# Allegro board 95569-501-A2.brd
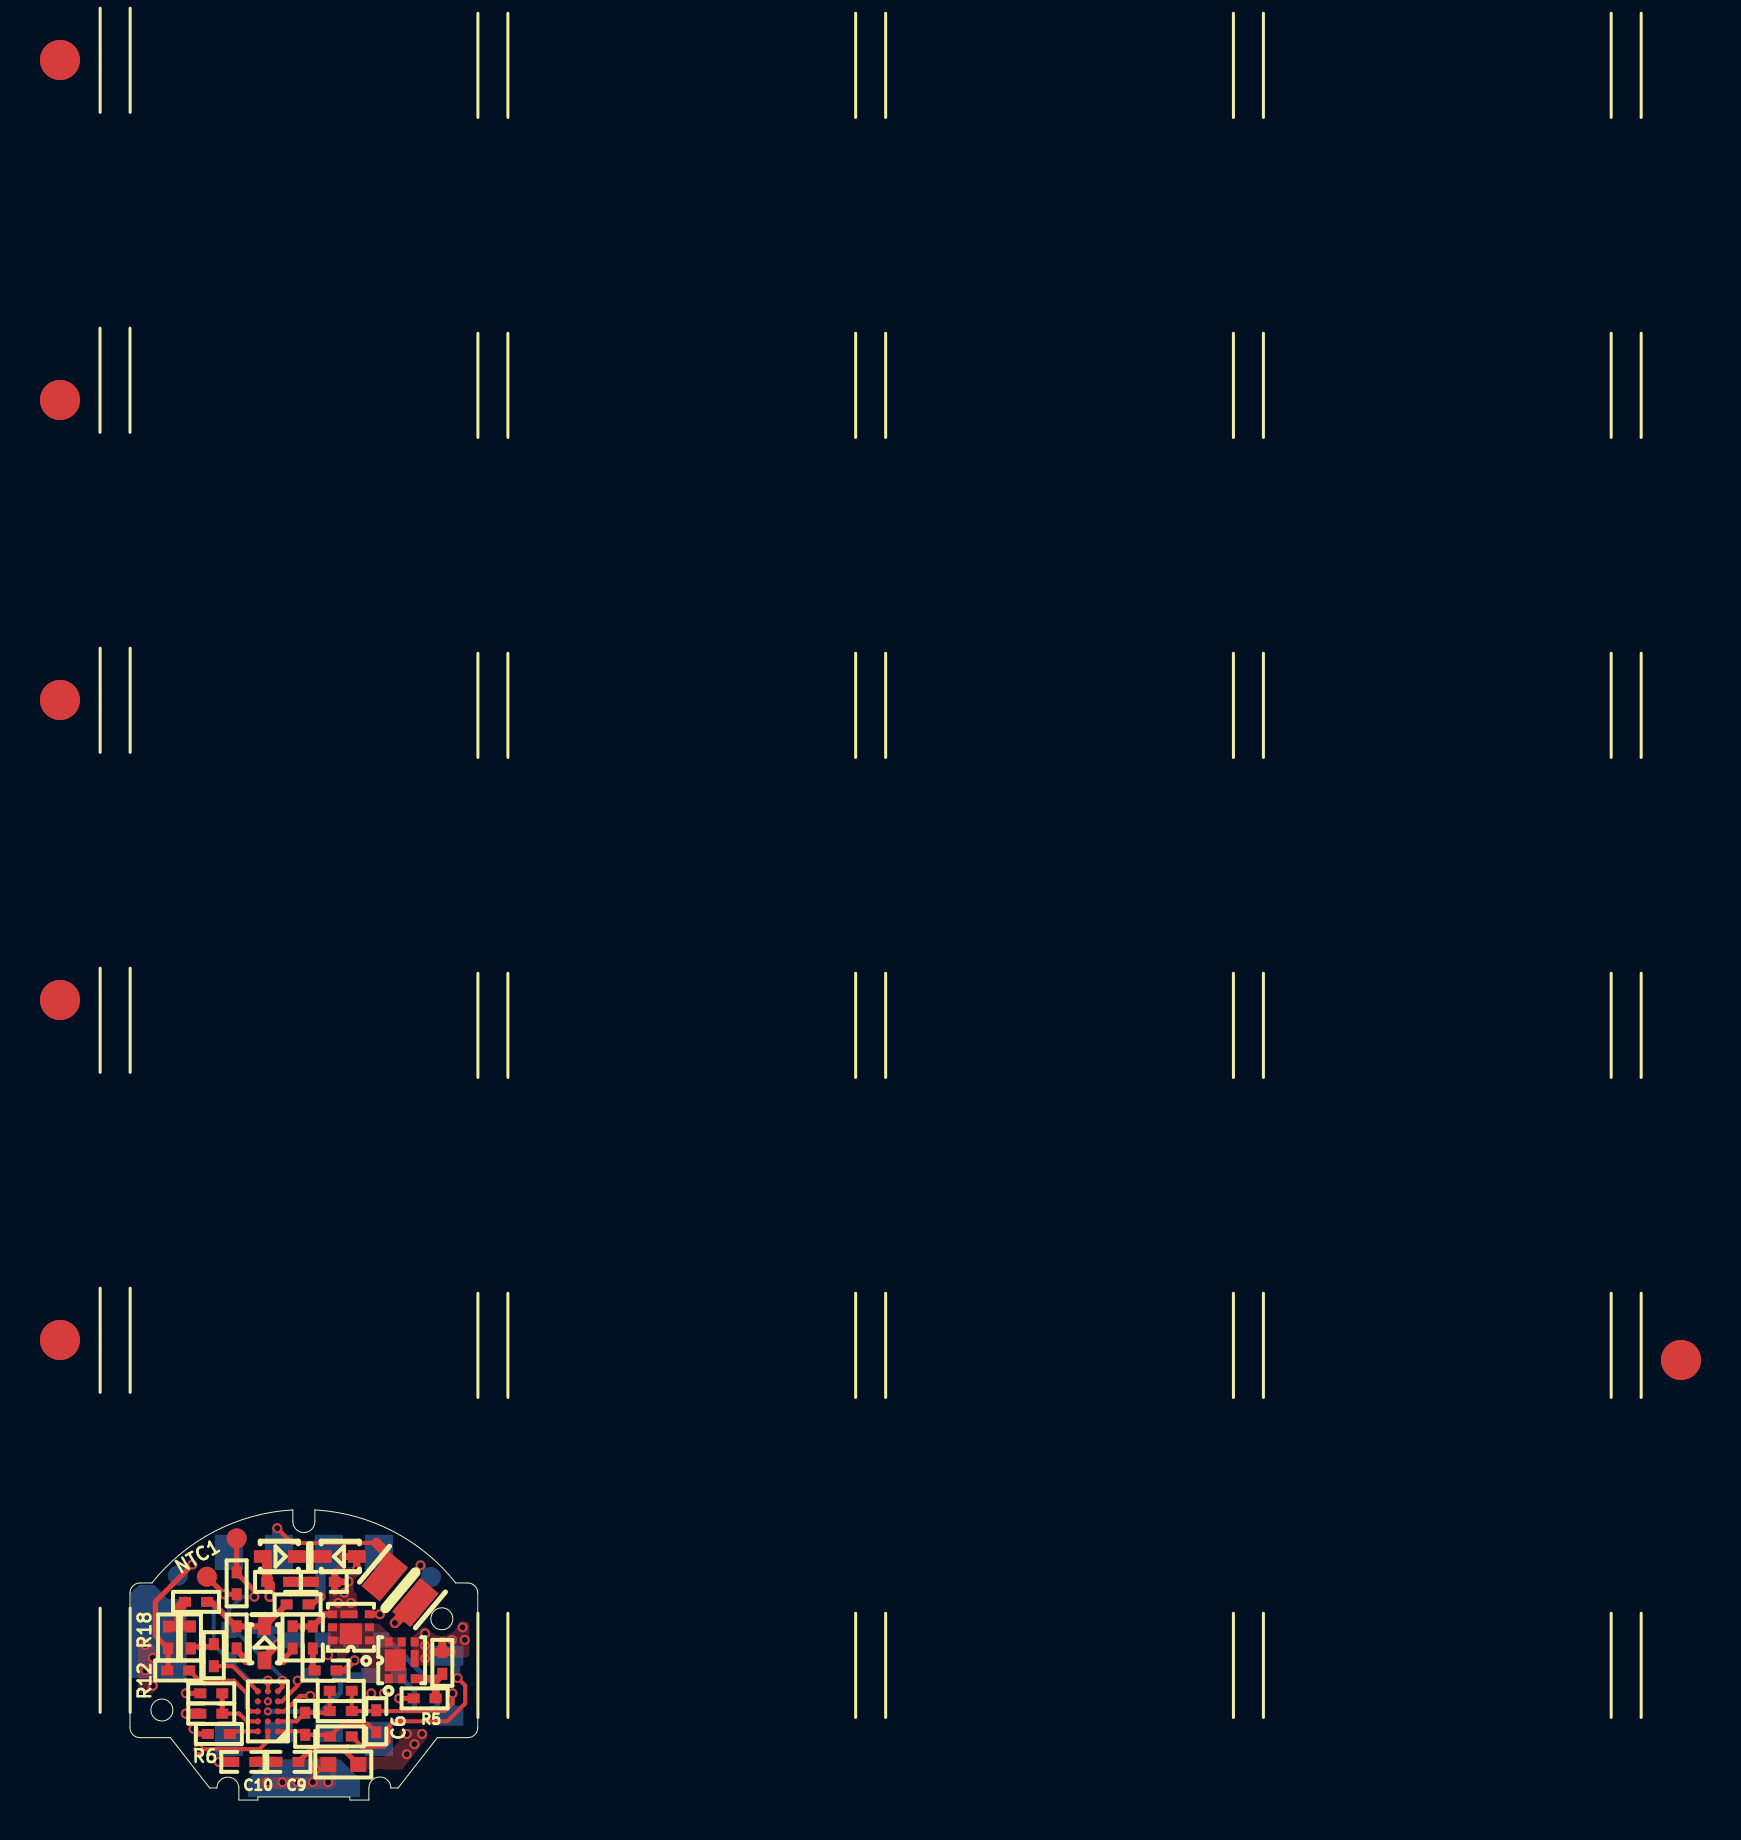
[diagram p0: board, top side]
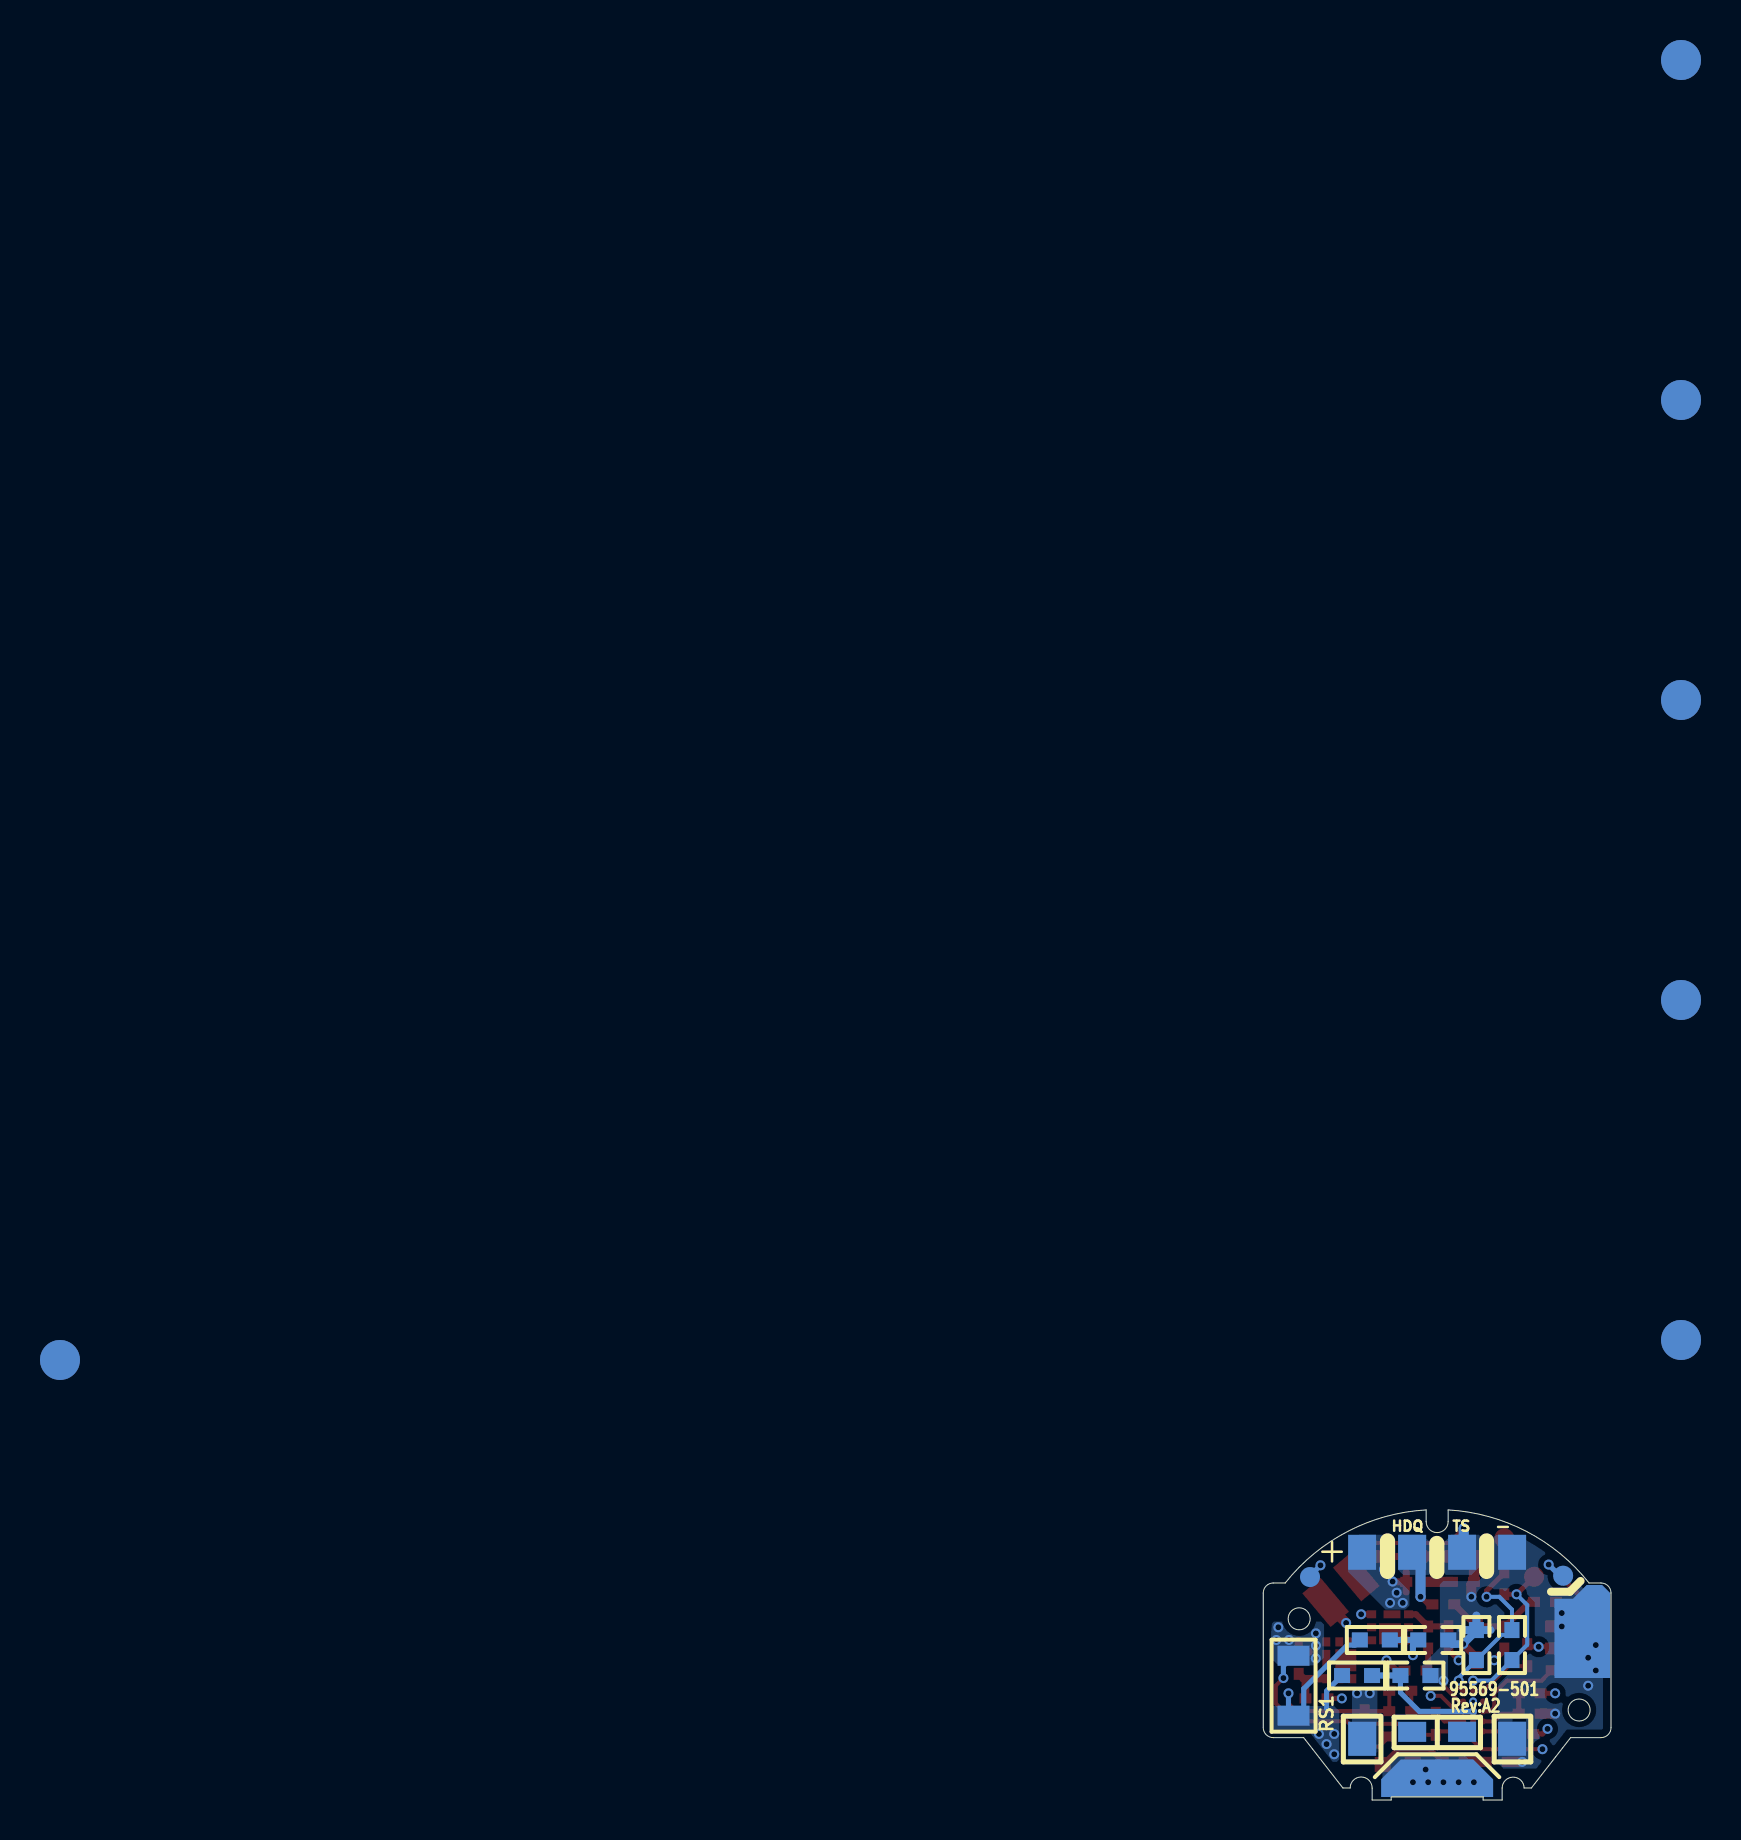
[diagram p1: board, bottom side, seen from below]

Outline 17.39 x 14.5 mm; copper layers: TOP, L2GND, L3, BOTTOM. Coordinates in mm from the lower left corner of the outline.
Outline path: circle c1.6,4.5 r0.55 ; circle c15.6,9.06 r0.55 ; 0,10.35 arc(0.15,10.7) 0.5,10.85 1.1,10.85 arc(4.23,13.43) 8.15,14.5 8.15,13.92 arc(8.7,13.37) 9.25,13.92 9.25,14.5 arc(13.16,13.43) 16.29,10.85 16.89,10.85 arc(17.24,10.7) 17.39,10.35 17.39,3.62 arc(17.24,3.27) 16.89,3.12 15.37,3.12 13.41,0.6 13.05,0.6 arc(12.5,1.15) 11.95,0.6 11.95,0 11,0 11,0.15 6.4,0.15 6.4,0 5.45,0 5.45,0.6 arc(4.9,1.15) 4.35,0.6 3.98,0.6 2.02,3.12 0.5,3.12 arc(0.15,3.27) 0,3.62 0,10.35

## Placement (name value [footprint] x y rotation side)
C1  0.1uF/25V  [0603C]  8.89 8 180 bottom
C2  0.1uF/25V  [0603C]  9.78 6.22 180 bottom
C3  0.47uF/10V  [0603C]  4.95 7.75 90 bottom
C4  4.7uF/10V  [0603C]  6.73 7.75 90 bottom
C5  0.1uF/16V  [0402C]  10.54 5.46 0 top
C6  0.1uF/16V  [0402C]  12.32 3.94 270 top
C7  0.1uF/16V  [0402C]  8.76 3.81 270 top
C8  0.1uF/16V  [0402C]  4.06 4.32 180 top
C9  0.1uF/16V  [0402C]  7.87 1.91 180 top
C10  0.1uF/16V  [0402C]  5.71 1.91 180 top
C11  0.1uF/16V  [0402C]  9.78 6.48 180 top
C12  0.1uF/16V  [0402C]  9.14 8.13 90 top
C13  0.1uF/16V  [0402C]  9.69 10.91 180 top
C14  0.1uF/16V  [0402C]  7.4 10.91 180 top
CELL+  Test Point  [TP15]  8.64 1.27 180 bottom
CELL-  Test Point  [TP15]  1.56 8.49 270 bottom
F1  5A 32V  [0603R]  10.67 1.78 0 top
J1  5795 output connector  [JACK-5795]  8.35 11.21 180 bottom
NOREF  -  []  -7.5 0 90 top
NOREF#2  -  []  1.6 4.5 0 top
NOREF#3  -  [unnamed#2]  -3.5 70 0 top
NOREF#4  -  []  -5.71 120.62 0 top
NOREF#5  -  [unnamed#2]  -3.5 23 0 top
NOREF#6  -  [unnamed#2]  -3.5 87 0 top
NOREF#7  -  []  18.89 3.62 0 top
NOREF#8  -  []  0 3.62 0 top
NOREF#9  -  []  -7.5 0 0 top
NOREF#10  -  []  17.35 11.61 0 top
NOREF#11  -  []  75.56 0 0 top
NOREF#12  -  []  6.4 16 90 top
NOREF#13  -  []  5.45 0 90 top
NOREF#14  -  [unnamed#2]  -3.5 55 0 top
NOREF#15  -  [unnamed#2]  -3.5 40 0 top
NOREF#16  -  []  -7.5 0 0 top
NOREF#17  -  []  54.99 -7.62 0 top
NOREF#18  -  [unnamed#2]  77.56 22 0 top
NOREF#19  -  [unnamed#2]  -3.5 87 180 bottom
NOREF#20  -  [unnamed#2]  -3.5 40 180 bottom
NOREF#21  -  [unnamed#2]  -3.5 70 180 bottom
NOREF#22  -  [unnamed#2]  -3.5 55 180 bottom
NOREF#23  -  [unnamed#3]  9.95 3.41 180 bottom
NOREF#24  -  [unnamed#3]  7.45 3.41 180 bottom
NOREF#25  -  [unnamed#2]  -3.5 23 180 bottom
NOREF#26  -  [unnamed#2]  77.56 22 180 bottom
NTC1  0402 10K B=3435K  [0402R]  5.33 10.83 270 top
NTC2  NXFT15XH103FA2B025  [NTC2-5795]  12.74 11.16 320 top
PACK+  Test Point  [PAD1D4X1D7]  12.45 3.06 180 bottom
PACK-  Test Point  [PAD1D4X1D7]  4.95 3.06 180 bottom
Q1  CSD13202q2/AP6982GN2  [SON6]  11.05 8.64 90 top
Q2  CSD13202q2/AP6982GN2  [SON6]  13.59 6.99 0 top
R3  200R  [0402R]  10.54 4.45 0 top
R4  200R  [0402R]  10.54 3.18 0 top
R5  1k  [0402R]  14.73 5.08 0 top
R6  1k  [0402R]  4.45 3.3 180 top
R7  10M  [0402R]  15.62 6.86 90 top
R8  10M  [0402R]  8.13 8.13 90 top
R9  2k  [0402R]  4.06 5.33 180 top
R10  100R  [0402R]  5.33 8.13 270 top
R11  100R  [0402R]  8.38 9.78 180 top
R12  100R  [0402R]  2.41 6.48 0 top
R14  100R  [0402R]  4.19 7.24 270 top
R16  1M  [0402R]  3.3 9.91 180 top
R17  1M  [0402R]  3.05 8.13 90 top
R18  1M  [0402R]  1.91 8.13 90 top
RF1  10R  [0603R]  11.81 8 0 bottom
RF2  10R  [0603R]  12.7 6.22 0 bottom
RS1  10mR  [1206R]  15.88 5.72 90 bottom
TP1  Test Point  [TP10]  2.39 11.21 190 bottom
TP2  Test Point  [TP10]  15.05 11.15 170 bottom
TP15  Test Point  [TP10]  3.85 11.16 0 top
TP16  Test Point  [TP10]  5.33 13.08 0 top
U1  SN27742  [BGA-15-50]  6.9 4.43 180 top
ZD1  5V  [SOD-523-AK]  6.73 7.87 90 top
ZD4  ESD5Z12T1G  [SOD-523-AK]  10.45 12.18 180 top
ZD5  ESD5Z12T1G  [SOD-523-AK]  7.53 12.18 0 top

## Library data of the parts
C1-C14 = 0603C
CELL+ CELL- PACK+ PACK- TP1 TP2 TP15 TP16 = Test Point
F1 = FUSE2
J1 = 5795 output connector
NTC1 NTC2 = NTC
Q1 Q2 = MOS-8PIN-SGD_1
R3-R12 R14 R16-R18 RF1 RF2 = 0603R
RS1 = R
U1 = bq27742-G1
ZD1 ZD4 ZD5 = ZENER_1

## Footprints (pads in the part's own frame, mm; a bottom-side part is the same pattern mirrored in y, then rotated)
0402C
  rect 0.6x0.5 smd: 1(-0.55,0) 2(0.55,0)
0402R
  rect 0.6x0.5 smd: 1(-0.55,0) 2(0.55,0)
0603C
  rect 0.8x0.75 smd: 1(-0.75,0) 2(0.75,0)
0603R
  rect 0.8x0.75 smd: 1(-0.75,0) 2(0.75,0)
1206R
  rect 1x1.6 smd: 1(-1.5,0) 2(1.5,0)
BGA-15-50
  round 0.305 smd: A1(-0.5,1) A2(0,1) A3(0.5,1) B1(-0.5,0.5) B2(0,0.5) B3(0.5,0.5) C1(-0.5,0) C2(0,0) C3(0.5,0) D1(-0.5,-0.5) D2(0,-0.5) D3(0.5,-0.5) E1(-0.5,-1) E2(0,-1) E3(0.5,-1)
JACK-5795
  rect 1.4x1.75 smd: 1(-4.091,1.178) 2(-1.591,1.178) 3(0.909,1.178) 4(3.409,1.178)
NTC2-5795
  rect 1.2x2.2 smd: 1(0,0) 2(2,0)
PAD1D4X1D7
  rect 1.4x1.7 smd: 1(0,0)
SOD-523-AK
  rect 0.889x0.635 smd: A(-0.889,0) K(0.813,0)
SON6
  rect 0.4x0.455 smd: D1(-0.65,-0.922) D2(0,-0.922) D3(0,0.922) D4(-0.65,0.922) G(0.65,-0.922) S1(0.65,0.922)
  rect 1.05x1.1 smd: D5(-0.325,0)
  rect 0.4x0.85 smd: S2(0.65,0.096)
TP10
  round 1 smd: 1(0,0)
TP15
  round 1.5 smd: 1(0,0)
unnamed#2
  round 2 smd: 1(0,0)
unnamed#3
  rect 1.4x1 smd: 1(0,0)

## Nets
GND: C1.2 C2.2 C4.2 C8.2 C10.2 C14.2 CELL-.1(TP) J1.4(PACK-) NTC2.2 PACK-.1(TP) R16.2 R17.2 R18.2 U1.D1(VSS) ZD1.A ZD5.A
N00340: Q1.D1 Q1.D2 Q1.D3 Q1.D4 Q1.D5 Q2.D1 Q2.D2 Q2.D3 Q2.D4 Q2.D5
N00474: C11.1 Q2.S1 Q2.S2 R4.2 R7.2 RS1.2
N00529: C12.2 C13.1 J1.1(PACK+) PACK+.1(TP) Q1.S1 Q1.S2 R8.2 R9.2 ZD4.A
N00793: C5.2 C6.1 C9.1 F1.2 R3.2 RF1.2 RF2.2 RS1.1
N00855: C1.1 RF1.1 U1.C1(VPWR)
N00862: C2.1 RF2.1 U1.C2(BAT)
N01269: C3.2 C4.1 NTC1.1 TP16.1(TP) U1.E1(REG25)
N01379: C3.1 NTC1.2 TP15.1(TP) U1.E2(TS)
N01597: C5.1 C7.1 R3.1 U1.B1(SRN)
N01602: C6.2 C7.2 R4.1 U1.A1(SRP)
N02161: Q2.G R5.2 R7.1
N02165: R5.1 U1.A2(CHG)
N02204: Q1.G R6.2 R8.1
N02208: R6.1 U1.A3(DSG)
N02619: C8.1 R9.1 U1.B3(PACKP)
N02905: C9.2 C10.1
N03470: C11.2 C12.1
N04907: R10.2 U1.D2(HDQ)
N04919: R10.1 R11.2 R16.1 ZD1.K
N05203: R12.1 R18.1 TP1.1(TP)
N05207: R14.1 R17.1 TP2.1(TP)
N9623273: R12.2 U1.C3(SDA)
N9623277: R14.2 U1.E3(SCL)
N9626839: CELL+.1(TP) F1.1
N9637865: C13.2 C14.1
N9637929: ZD4.K ZD5.K
N9639478: J1.3(TS) NTC2.1
N9646129: J1.2(HDQ) R11.1

Pads without a net: NOREF#3 1; NOREF#5 1; NOREF#6 1; NOREF#14 1; NOREF#15 1; NOREF#18 1; NOREF#19 1; NOREF#20 1; NOREF#21 1; NOREF#22 1; NOREF#23 1; NOREF#24 1; NOREF#25 1; NOREF#26 1; U1 B2 D3

## Via types
v1: diameter 0.5, hole 0.3, TOP to BOTTOM, 56 vias
v2: diameter 0.4, hole 0.2, TOP to BOTTOM, 2 vias

## Routing (per net, layer and track width the routed paths; a pad name or vN(x,y) marks a point on that pad's centre or on a via; arc(x,y) is an arc through that point)
GND: length 14.1
  TOP w0.2: v1(8.38,5.97) 8.38,5.72 7.6,4.93 U1.D1
  TOP w0.381: ZD1.A 6.73,7.14 v1(7.39,7.8)
  TOP w0.508: v1(2.46,8.68) R18.2 ; v1(2.46,8.68) R17.2 ; v1(2.46,8.68) v1(2.46,9.35) 2.46,9.63 2.74,9.91 R16.2 ; ZD5.A 6.85,11.96 C14.2 6.99,10.78 v1(6.99,10.16) ; C8.2 v1(2.79,4.32) ; v1(13.25,8.85) NTC2.2 ; C10.2 v1(4.45,1.91)
  BOTTOM w0.381: C1.2 7.94,7.8 v1(7.39,7.8) 6.73,8.46 C4.2
  BOTTOM w0.4: 6.03,8.5 C4.2 ; C4.2 7.43,8.5 ; C4.2 6.73,9.22
  vias: v1(0.76,7.75) v1(0.76,6.48) v1(1.14,7.11) v1(1.14,5.72)
N00474: length 16.2
  TOP w0.2: R4.2 11.6,2.67 12.7,2.67 12.95,2.92 12.95,3.68 13.21,3.94 15.88,3.94 16.76,4.83 16.76,5.72 v1(16.38,6.1)
  TOP w0.305: C11.1 10.72,6.48 v1(11.23,6.99)
  TOP w0.4: R7.2 16.12,7.41 ; R7.2 15.12,7.41 ; R7.2 15.62,7.96
  L3 w0.305: v1(11.23,6.99) 14.67,6.99 v1(14.76,7.08)
  BOTTOM w0.254: v1(16.38,6.1) 16.38,6.71 RS1.2
  vias: v1(14.76,8.33) v1(14.76,7.72) v1(16.1,8) v1(16.64,8.64) v1(16.74,8)
N00529: length 24
  TOP w0.254: R9.2 v1(2.79,5.33)
  TOP w0.305: Q1.S1 9.75,9.29 C12.2 R8.2
  TOP w0.356: C13.1 10.24,11.41 ; C13.1 10.79,10.91 ; C13.1 10.24,10.41 ; 10.65,12.18 ZD4.A 11.34,11.61
  L2GND w0.508: v1(12.7,5.33) v1(12.06,5.33) ; v1(10.92,10.92) 10.92,10.57 v1(10.72,10.36) 10.72,10.16 v1(10.41,9.86) v1(11.05,9.86) 11.05,10.8 v1(10.92,10.92)
  L2GND w0.762: 12.45,5.33 12.45,7.62 11.05,9.02 v1(11.05,9.86)
  L3 w0.305: v1(10.41,9.86) 10.08,9.53 6.99,9.53 v1(2.79,5.33)
  vias: v1(11.35,11.53)
N00793: length 18.6
  TOP w0.2: v1(16.13,5.33) 16.13,4.83 15.75,4.45 12.36,4.45 C6.1 12.28,4.45 R3.2 C5.2
  TOP w0.254: C9.1 9.06,2.54 10.66,2.54 F1.2
  BOTTOM w0.254: RS1.1 16.13,4.47 v1(16.13,5.33) ; 15.37,4.32 15.37,5.56 13.18,7.75 12.82,7.75 RF1.2 ; RF2.2 14.22,5.45 14.22,4.57
  vias: v1(13.84,3.3) v1(13.84,2.29) v1(14.22,2.79) v1(14.61,3.3)
N00855: length 6.6
  TOP w0.2: U1.C1 7.73,4.43 8.51,5.21 v1(9.02,5.21)
  L3 w0.305: v1(9.91,7.24) 9.91,6.1 v1(9.02,5.21)
  BOTTOM w0.305: RF1.1 C1.1 9.91,7.74 v1(9.91,7.24)
N00862: length 6.3
  BOTTOM w0.254: v2(6.9,4.43) 9.59,4.43 10.53,5.37 C2.1
  BOTTOM w0.305: RF2.1 C2.1
N01269: length 10.3
  TOP w0.2: v1(7.62,5.97) 7.62,5.65 U1.E1
  TOP w0.254: TP16.1 NTC1.1 5.33,11.35 6.22,10.47 v1(6.22,10.16)
  BOTTOM w0.2: v1(7.62,5.97) 7.62,6.11 C4.1 5.47,8.26 5.15,8.26 4.95,8.46 C3.2 4.95,9.53 5.59,10.16 v1(6.22,10.16)
N01379: length 8.6
  TOP w0.2: U1.E2 v1(6.9,5.97)
  TOP w0.254: TP15.1 v1(4.73,10.28) NTC1.2
  BOTTOM w0.2: v1(4.73,10.28) 4.19,9.75 4.19,7.76 C3.1 5.98,5.97 v1(6.9,5.97)
N01597: length 3.8
  TOP w0.2: C5.1 R3.1 9.91,4.36 C7.1 8.33,3.93 U1.B1
N01602: length 5.5
  TOP w0.2: U1.A1 8.59,3.43 C7.2 9.91,3.26 R4.1 10.63,3.81 11.9,3.81 C6.2
N02161: length 2.5
  TOP w0.381: 15.38,6.06 R7.1 ; 15.38,6.06 15.28,5.97 R5.2 ; 15.38,6.06 Q2.G
N02165: length 15.9
  TOP w0.2: U1.A2 6.9,2.96 6.48,2.54 v1(3.43,2.54)
  TOP w0.254: v1(13.46,5.08) R5.1
  L3 w0.305: v1(3.43,2.54) 10.92,2.54 v1(13.46,5.08)
N02204: length 13.8
  TOP w0.254: v1(3.17,3.56) 3.43,3.3 R6.2 ; v1(7.62,6.99) 8.13,7.49 R8.1
  TOP w0.305: Q1.G v1(12.5,9.29)
  L3 w0.305: v1(3.17,3.56) 3.56,3.56 6.99,6.99 v1(7.62,6.99) 9.14,8.51 11.72,8.51 v1(12.5,9.29)
N02208: length 1.5
  TOP w0.2: R6.1 5.12,3.43 U1.A3
N02619: length 3
  TOP w0.2: C8.1 5.46,4.32 5.85,3.93 U1.B3
  TOP w0.254: R9.1 C8.1
N02905: length 1.1
  TOP w0.508: C10.1 C9.2
N03470: length 1.1
  TOP w0.305: C11.2 9.14,6.56 C12.1
N04907: length 3.3
  TOP w0.305: R10.2 5.33,7.49 v1(5.84,6.99)
  L2GND w0.305: v1(5.84,6.99) 5.84,5.98 v2(6.9,4.93)
N04919: length 4.9
  TOP w0.305: R11.2 6.74,8.69 ZD1.K 6.72,8.68 R10.1 5.29,8.68 4.06,9.91 R16.1
N05203: length 7.3
  TOP w0.254: v1(3.12,11.77) 1.27,9.92 1.27,8.21 R18.1 1.91,6.52 R12.1
  BOTTOM w0.254: v1(3.12,11.77) 2.56,11.21 TP1.1
N05207: length 17
  TOP w0.254: R14.1 4.06,7.66 v1(3.62,7.66) 3.13,7.66 R17.1
  L3 w0.305: v1(14.53,11.74) 13.28,11.74 12.45,12.57 10.29,12.57 9.46,11.75 4.76,11.75 3.62,10.6 v1(3.62,7.66)
  BOTTOM w0.254: TP2.1 15.05,11.21 v1(14.53,11.74)
N9623273: length 4.7
  TOP w0.2: R12.2 3.47,5.97 5.21,5.97 5.84,5.33 5.84,4.63 6.04,4.43 U1.C3
N9623277: length 2.7
  TOP w0.2: U1.E3 5.14,6.69 R14.2
N9626839:
  vias: v1(6.86,0.89) v1(7.62,0.89) v1(8.38,0.89) v1(9.14,0.89) v1(9.27,1.52) v1(9.91,0.89)
N9637865: length 1.2
  TOP w0.508: C14.1 C13.2
N9637929: length 1.3
  TOP w0.508: ZD5.K ZD4.K
N9639478: length 8.2
  TOP w0.2: 12.32,12.85 8.1,12.85 v1(7.37,13.59)
  TOP w0.508: NTC2.1 12.74,12.43 12.32,12.85
  BOTTOM w0.508: 7.37,12.46 v1(7.37,13.59)
N9646129: length 2.6
  TOP w0.254: R11.1 9.14,9.78 v1(9.53,10.16)
  BOTTOM w0.508: v1(9.53,10.16) 9.53,11.96

## Copper pours and planes (outline as drawn; the poured copper is in the pictures)
GND on BOTTOM (solid shape): 1.91,10.06 2.83,10.06 2.83,6.1 0.04,6.1 0.04,10.34 0.44,10.75 1.21,10.75
GND on TOP: 0.4,5.46 0.4,7.89 0.51,8 0.89,8 1.27,7.62 1.27,5.46 1.14,5.33 0.53,5.33
GND on BOTTOM: 3.73,1.58 2.22,3.52 0.5,3.52 0.43,3.55 0.4,3.62 0.4,8.35 0.5,9.06 0.79,9.72 2.52,11.78 4.78,13.25 5.74,13.25 5.84,13.16 5.84,11.74 6.63,10.95 8.38,10.95 8.56,10.77 8.56,7.62 9.45,6.73 9.45,5.84 8.64,5.84 8.48,5.69 8.26,5.69 8.15,5.79 8.15,7.34 7.62,7.87 5.71,7.87 5.64,7.8 5.64,1.83 5.38,1.58 ; 3 cut-outs
GND on L2GND, L3: 5.85,0.4 5.85,0.6 5.16,1.51 4.09,1.11 2.22,3.52 0.5,3.52 0.43,3.55 0.4,3.62 0.4,8.35 0.5,9.06 0.79,9.72 3.76,12.7 7.75,14.07 7.75,13.92 8.7,12.97 9.65,13.92 9.65,14.07 13.63,12.7 16.6,9.72 16.89,9.06 16.99,8.35 16.99,3.62 16.96,3.55 16.89,3.52 15.18,3.52 13.3,1.11 12.23,1.51 11.55,0.6 11.55,0.4 11.4,0.4 11.4,0.55 6,0.55 6,0.4
N00340 on TOP: 13.77,5.84 13.77,8.13 13.16,8.13 12.47,8.81 9.91,8.81 9.91,7.11 10.03,6.99 11.68,6.99 11.68,5.97 11.81,5.84
N00474 on TOP: 14.1,6.73 14.1,8.13 14.61,8.64 16.31,8.64 16.33,8.66 16.33,8.74 16.51,8.92 16.87,8.92 16.94,8.84 16.96,8.77 16.97,8.7 16.97,7.24 16.84,7.11 15.39,7.11 15.01,6.73
N00474 on BOTTOM: 14.73,6.73 14.35,7.11 14.35,8.76 14.5,8.92 16.87,8.92 16.94,8.84 16.98,8.59 16.99,8.35 16.99,7.08 16.64,6.73
N00529 on TOP: 9.91,9.09 11.35,9.09 11.35,10.29 11.18,10.47 11.18,10.97 11.61,11.4 11.61,12.27 11.43,12.45 10.54,12.45 10.45,12.36 10.45,11.8 9.91,11.25
N00529 on BOTTOM: 10.08,10.44 11.15,11.51 11.15,13.03 11.38,13.26 12.6,13.26 13.13,12.73 13.13,11.38 11.28,9.53 10.29,9.53 10.08,9.73
N00529 on BOTTOM: 11.68,5.46 11.68,2.41 11.81,2.29 12.83,2.29 12.95,2.41 12.95,5.46 12.83,5.59 11.81,5.59
N00793 on TOP: 11.05,1.52 11.05,2.16 12.7,2.16 13.46,2.92 13.46,3.43 13.59,3.56 14.73,3.56 14.86,3.43 14.86,3.11 13.62,1.53 12.7,1.53 12.49,1.55 12.27,1.52
N00793 on BOTTOM: 13.59,4.45 13.84,4.7 16.89,4.7 16.99,4.6 16.99,3.62 16.96,3.55 16.89,3.52 15.18,3.52 13.92,1.91 13.72,1.91 13.59,2.03
N9626839 on BOTTOM (solid shape): 11.5,1.04 11.5,0.15 5.9,0.15 5.9,1.03 6.9,2.03 10.5,2.03
N9626839 on TOP: 6.48,1.14 8.94,1.14 9.02,1.22 9.02,1.78 9.4,2.16 10.29,2.16 10.29,0.76 10.08,0.55 6.43,0.55 6.35,0.64 6.35,1.02 ; 1 cut-out
N9626839 on BOTTOM: 10.58,2.25 11.43,1.4 11.43,0.4 11.4,0.4 11.4,0.55 6.35,0.55 6.35,1.27 7.33,2.25
N9639478 on BOTTOM: 6.5,11.74 6.5,13.16 6.6,13.26 7.98,13.26 8.46,12.78 8.46,11.46 8.26,11.25 6.99,11.25
N9646129 on BOTTOM: 9.42,13.26 10.64,13.26 10.64,11.51 10.39,11.25 9.12,11.25 8.92,11.46 8.92,12.75

## Text on the board
Ref Des/Silkscreen Bottom: TS | HDQ | Rev:A2 | 95569-501 | _ | +
DIMENSION: Routing
User.9: FIGURE | SIZE | 0.1999 | 0.3 | DRILL CHART: TOP to BOTTOM | ALL UNITS ARE IN MILLIMETERS | PLATED | QTY | 2 | 56
